# EAGLE board Remote_Board_V2.0 (EAGLE 9.6.2)
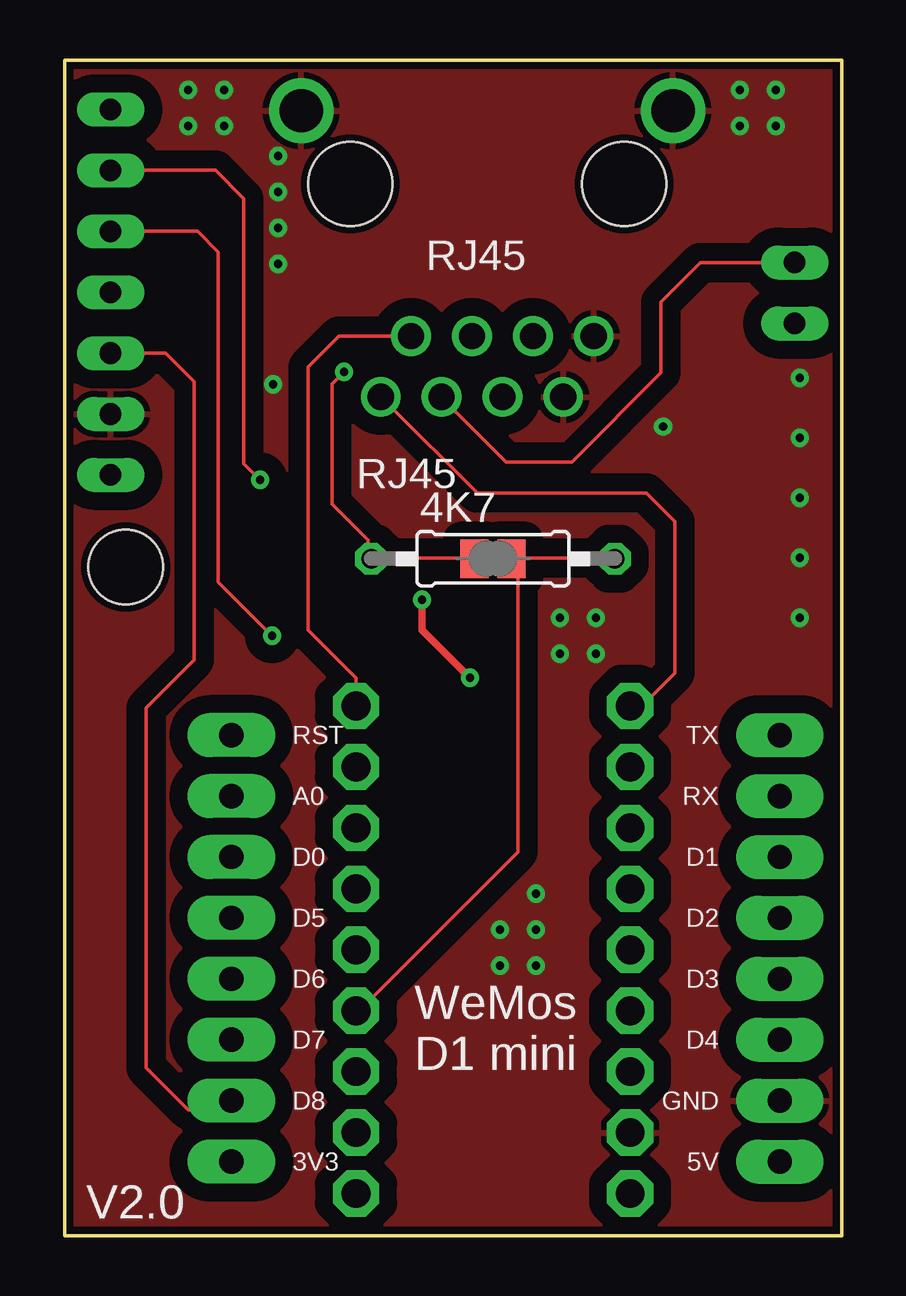
[diagram p0: board, top side]
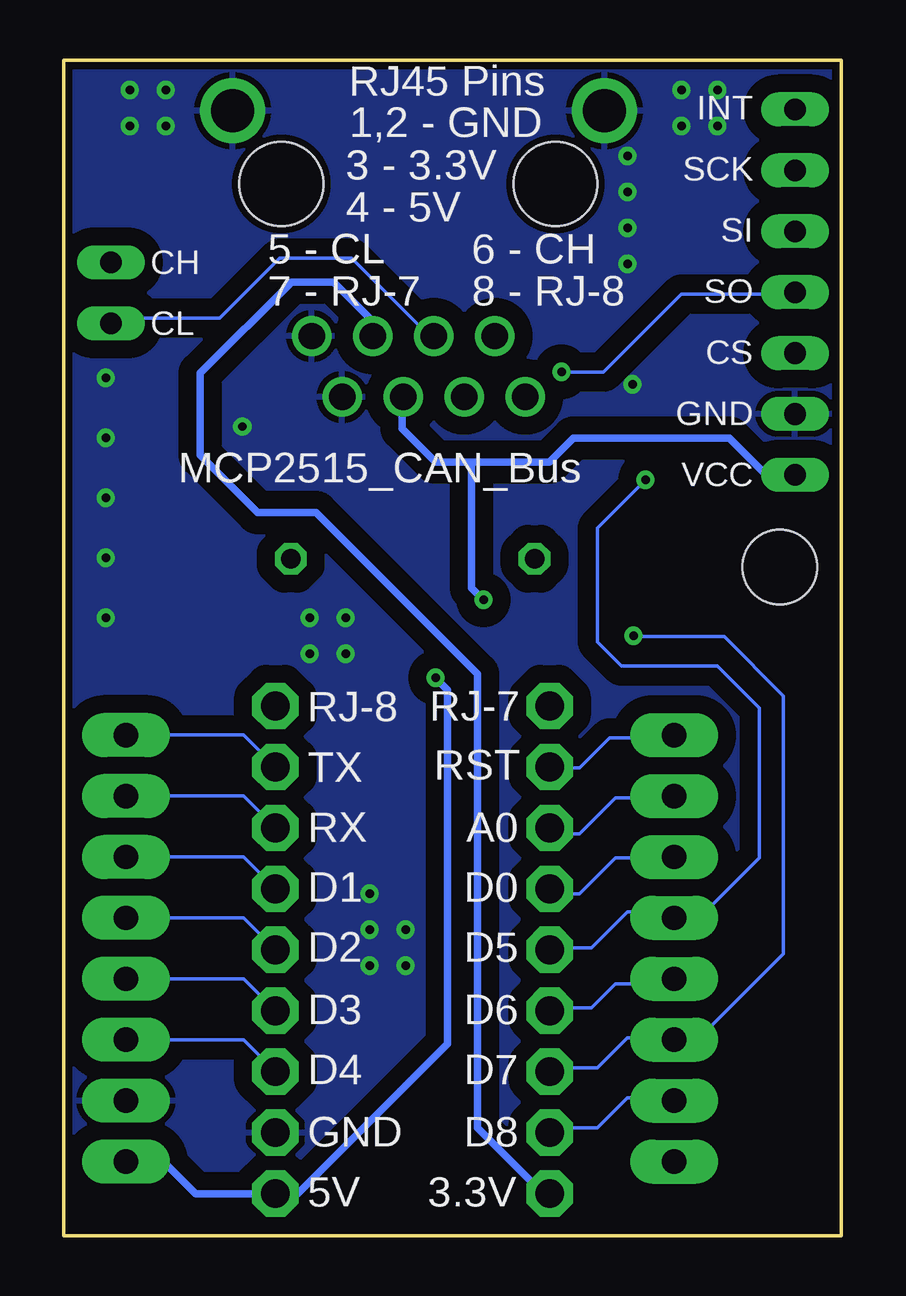
[diagram p1: board, bottom side, seen from below]

Size 32.4 x 49 mm. Coordinates in mm from the lower left corner, seen from the top.
Outline: 0,0 0,49 32.4,49 32.4,0 0,0
Copper layers (1*16): Top 0.035mm / dielectric 1.5mm / Bottom 0.035mm
Design rules "default *": minimum track width 6mil, minimum drill 0.35mm, track to track 0.75mm, track to pad 0.75mm, pad to pad 6mil, via to via 6mil, smd to smd 6mil, copper to edge 0.3mm, drill to drill 6mil, minimum pad ring 10mil, minimum via ring 8mil, stop-mask expansion 4mil, vias tented up to drill 0mil, thermal gap 10mil
Net classes: 0 default: width 0.15 mm; 1 +5V: width 0.305 mm; 2 GND: width 0.305 mm; 3 +3.3V: width 0.305 mm; 4 SCL: width 0.15 mm; 5 SDA: width 0.15 mm

## Footprints (pad centres in the part's own frame; a part is rotated, then mirrored left to right if it is on the bottom)
0207/10 = drill 0.813 octagon: 1 -5.08,0; 2 5.08,0
WEMOS-D1-MINI_SEM_LAYOUT = drill 1.016 pad 1.829 long: 3V3 -10.16,-10.16; 5V 12.7,-10.16; A0 -10.16,5.08; D0 -10.16,2.54; D1 12.7,2.54; D2 12.7,0; D3 12.7,-2.54; D4 12.7,-5.08; D5 -10.16,0; D6 -10.16,-2.54; D7 -10.16,-5.08; D8 -10.16,-7.62; GND 12.7,-7.62; RESET -10.16,7.62; RX 12.7,5.08; TX 12.7,7.62
ALI-RJ45_SEM_LAYOUT = drill 1.1: 1 -4.445,6.35; 2 -3.175,8.89; 3 -1.905,6.35; 4 -0.635,8.89; 5 0.635,6.35; 6 1.905,8.89; 7 3.175,6.35; 8 4.445,8.89 | drill 1.8: P$1 -7.75,-3.05; P$2 7.75,-3.05 | hole 3.5: -5.715,0; 5.715,0
SJ = smd 1.168 x 1.6: 1 -0.762,0; 2 0.762,0
TP = drill 1.2 pad 1.93 octagon: P$1 0,0
MCP2515_MODULE_SEM_LAYOUT = drill 0.9 pad 1.3 long: CH 28.52,-6.38; CL 28.52,-8.92; CS 0,-10.16; GND 0,-12.7; INT 0,0; MISO 0,-7.62; MOSI 0,-5.08; SCK 0,-2.54; VCC 0,-15.24 | hole 3.1: 0.63,-19.07

## Placement (x,y rotation side)
4K7  [0207/10]  17.86,28.21 0 top
ESP8266D1MINI  [WEMOS-D1-MINI_SEM_LAYOUT]  17.12,13.24 0 top
RJ45  ALI-RJ45_SEM_LAYOUT  [ALI-RJ45_SEM_LAYOUT]  17.62,43.84 180 top
SJ1  [SJ]  17.86,28.21 0 top
U$1  TP  [TP]  12.15,19.53 0 top
U$2  TP  [TP]  12.15,16.99 0 top
U$3  TP  [TP]  12.15,14.45 0 top
U$4  TP  [TP]  12.15,11.91 0 top
U$5  TP  [TP]  12.15,9.37 0 top
U$6  TP  [TP]  23.58,19.53 0 top
U$7  TP  [TP]  23.58,16.99 0 top
U$8  TP  [TP]  12.15,6.83 0 top
U$9  TP  [TP]  12.15,4.29 0 top
U$10  TP  [TP]  12.15,1.75 0 top
U$11  TP  [TP]  23.58,14.45 0 top
U$12  TP  [TP]  23.58,11.91 0 top
U$13  TP  [TP]  23.58,9.37 0 top
U$14  TP  [TP]  23.58,6.83 0 top
U$15  TP  [TP]  23.58,4.29 0 top
U$16  TP  [TP]  23.58,1.75 0 top
U$17  TP  [TP]  12.15,22.07 0 top
U$18  TP  [TP]  23.58,22.07 0 top
U$31  MCP2515_MODULE_SEM_LAYOUT  [MCP2515_MODULE_SEM_LAYOUT]  1.92,46.94 0 top

## Library data of the parts
4K7 = rcl; SPICEPREFIX: R
ESP8266D1MINI = esp8266modules
RJ45 = AliExpressRJ45
SJ1 = jumper
U$1-U$18 = edurobotParts
U$31 = MCP2515_Module

## Nets
GND [GND]: ESP8266D1MINI.GND RJ45.1 RJ45.2 RJ45.P$1 RJ45.P$2 U$15.P$1 U$31.GND
N$1 [+3.3V]: RJ45.3 U$10.P$1
N$2: RJ45.7 U$17.P$1
N$3: RJ45.8 U$18.P$1
N$4: ESP8266D1MINI.RESET U$1.P$1
N$5: ESP8266D1MINI.A0 U$2.P$1
N$6: ESP8266D1MINI.D0 U$3.P$1
N$7: ESP8266D1MINI.D5 U$4.P$1 U$31.SCK
N$8: 4K7.2 ESP8266D1MINI.D6 SJ1.2 U$5.P$1
N$9: ESP8266D1MINI.D7 U$8.P$1 U$31.MOSI
N$10: ESP8266D1MINI.D8 U$9.P$1 U$31.CS
N$11: RJ45.5 U$31.CL
N$12: RJ45.6 U$31.CH
N$13: ESP8266D1MINI.D4 U$14.P$1
N$14: ESP8266D1MINI.D3 U$13.P$1
N$15: ESP8266D1MINI.D2 U$12.P$1
N$16: ESP8266D1MINI.D1 U$11.P$1
N$17: ESP8266D1MINI.RX U$7.P$1
N$18: ESP8266D1MINI.TX U$6.P$1
N$19: 4K7.1 SJ1.1 U$31.MISO
N$21 [+5V]: ESP8266D1MINI.5V RJ45.4 U$16.P$1 U$31.VCC

## Tracks (layer width: path | path; a pad name or v marks a point on that pad's centre or on a via)
GND  (via drill 0.35)
  other vias: 8.69,35.48 24.96,33.72 30.65,35.75 30.65,33.25 30.65,30.75 30.65,28.25 30.65,25.75 20.65,25.75 22.15,25.75 22.15,24.25 20.65,24.25 28.15,47.75 28.15,46.25 29.65,47.75 29.65,46.25 5.15,47.75 5.15,46.25 6.65,47.75 6.65,46.25 8.9,42 8.9,40.5 8.9,43.5 8.9,45 19.65,14.25 19.65,12.75 19.65,11.25 18.15,11.25 18.15,12.75
  pour Top: -0.6,50 -0.6,-1 33.4,-1 33.4,50
  pour Bottom: -0.6,50 -0.6,-1 33.4,-1 33.4,50
N$1
  Bottom 0.305: U$10.P$1 12.4,1.75 15.15,4.5 15.15,23.41 21.88,30.14 24.32,30.14 26.71,32.53 26.71,35.94 22.9,39.75 21.15,39.75 19.65,38.25 19.65,37.5 RJ45.3
N$2
  Top 0.152: U$17.P$1 12.15,23.25 10.15,25.25 10.15,36.2 11.44,37.49 RJ45.7
N$3
  Top 0.152: U$18.P$1 24.06,22.07 25.43,23.44 25.43,29.77 24.27,30.94 17.21,30.94 13.4,34.75 RJ45.8
N$4
  Bottom 0.152: ESP8266D1MINI.RESET 7.15,20.75 9.65,20.75 10.9,19.5 12.15,19.5 U$1.P$1
N$5
  Bottom 0.152: ESP8266D1MINI.A0 7.15,18.25 9.4,18.25 10.9,16.75 12.15,16.75 U$2.P$1
N$6
  Bottom 0.152: ESP8266D1MINI.D0 7.15,15.75 9.4,15.75 10.9,14.25 12.15,14.25 U$3.P$1
N$7  (via drill 0.35)
  Top 0.152: U$31.SCK 6.29,44.4 7.47,43.22 7.47,32.17 v8.15,31.5
  Bottom 0.152: v8.15,31.5 10.15,29.5 10.15,24.75 9.15,23.75 5.15,23.75 3.4,22 3.4,15.75 5.65,13.5 | 5.65,13.5 5.9,13.25 6.9,13.25 ESP8266D1MINI.D5 5.65,13.5 | 5.65,13.5 8.9,13.5 10.4,12 12.15,12 U$4.P$1
N$8
  Top 0.152: 4K7.2 22.9,28.25 18.65,28.25 SJ1.2 18.65,28 18.9,27.75 18.9,16 12.15,9.25 U$5.P$1
  Bottom 0.152: ESP8266D1MINI.D6 7.15,10.5 9.4,10.5 10.4,9.5 12.15,9.5 U$5.P$1
N$9  (via drill 0.35)
  Top 0.152: v8.65,25 6.4,27.25 6.4,41 5.54,41.86 U$31.MOSI
  Bottom 0.152: v8.65,25 8.61,24.96 4.86,24.96 2.4,22.5 2.4,11.75 5.9,8.25 6.9,8.25 ESP8266D1MINI.D7 7.15,8.25 8.9,8.25 10.15,7 12.15,7 U$8.P$1
N$10
  Top 0.152: U$31.CS 4.21,36.78 5.4,35.59 5.4,24 3.4,22 3.4,7 5.15,5.25 6.9,5.25 6.9,5.5 ESP8266D1MINI.D8
  Bottom 0.152: U$9.P$1 12.15,4.5 10.15,4.5 8.9,5.75 7.15,5.75 ESP8266D1MINI.D8
N$11
  Bottom 0.152: U$31.CL 30.4,38.25 25.9,38.25 23.4,40.75 20.4,40.75 17.15,37.5 RJ45.5
N$12
  Top 0.152: RJ45.6 15.9,34.75 18.4,32.25 21.15,32.25 24.86,35.96 24.86,38.92 26.5,40.56 U$31.CH
N$13
  Bottom 0.152: ESP8266D1MINI.D4 24.9,8.16 U$14.P$1
N$14
  Bottom 0.152: ESP8266D1MINI.D3 24.91,10.7 U$13.P$1
N$15
  Bottom 0.152: U$12.P$1 24.91,13.24 ESP8266D1MINI.D2
N$16
  Bottom 0.152: U$11.P$1 24.91,15.78 ESP8266D1MINI.D1
N$17
  Bottom 0.152: U$7.P$1 24.91,18.32 ESP8266D1MINI.RX
N$18
  Bottom 0.152: ESP8266D1MINI.TX 24.91,20.86 U$6.P$1
N$19  (via drill 0.35)
  Top 0.152: SJ1.1 16.9,28.25 12.9,28.25 4K7.1 12.65,28.25 12.65,29 11.15,30.5 11.15,35.5 v11.65,36
  Bottom 0.152: v11.65,36 9.9,36 6.65,39.25 2.15,39.25 U$31.MISO
N$21  (via drill 0.35)
  Top 0.305: v16.9,23.25 14.9,25.25 v14.9,26.5
  Bottom 0.305: ESP8266D1MINI.5V 29.65,3 28.15,3 26.9,1.75 U$16.P$1 22.65,1.75 16.4,8 16.4,22.75 v16.9,23.25 | 15.4,32.25 16.9,32.25 18.3,33.64 18.3,34.89 RJ45.4 | 15.4,32.25 12.15,32.25 11.15,33.25 4.65,33.25 3.15,31.75 2.15,31.75 U$31.VCC | v14.9,26.5 15.4,27 15.4,32.25

## Text on the board
tPlace: V2.0
bPlace: RJ-7 | RJ-8 | RST | TX | A0 | RX | D0 | D1 | D5 | D2 | D6 | D3 | D7 | D4 | D8 | GND | 3.3V | 5V
bNames: RJ45 Pins | 1,2 - GND | 3 - 3.3V | 4 - 5V | 6 - CH | 5 - CL | 8 - RJ-8 | 7 - RJ-7